# Altium PCB MainBoard_PCB.PcbDoc (part 2 of 2)
Units mm, origin at the board's own origin, x right, y up, seen from the top; angles counter-clockwise.
Board outline 240.1 x 211.02 mm, 2 copper layers (Top Layer, Bottom Layer), stack 3 mm thick; 164 components, 42 nets, 290 pads, 108 vias.
Unrouted connection lines stored in the file: 1.
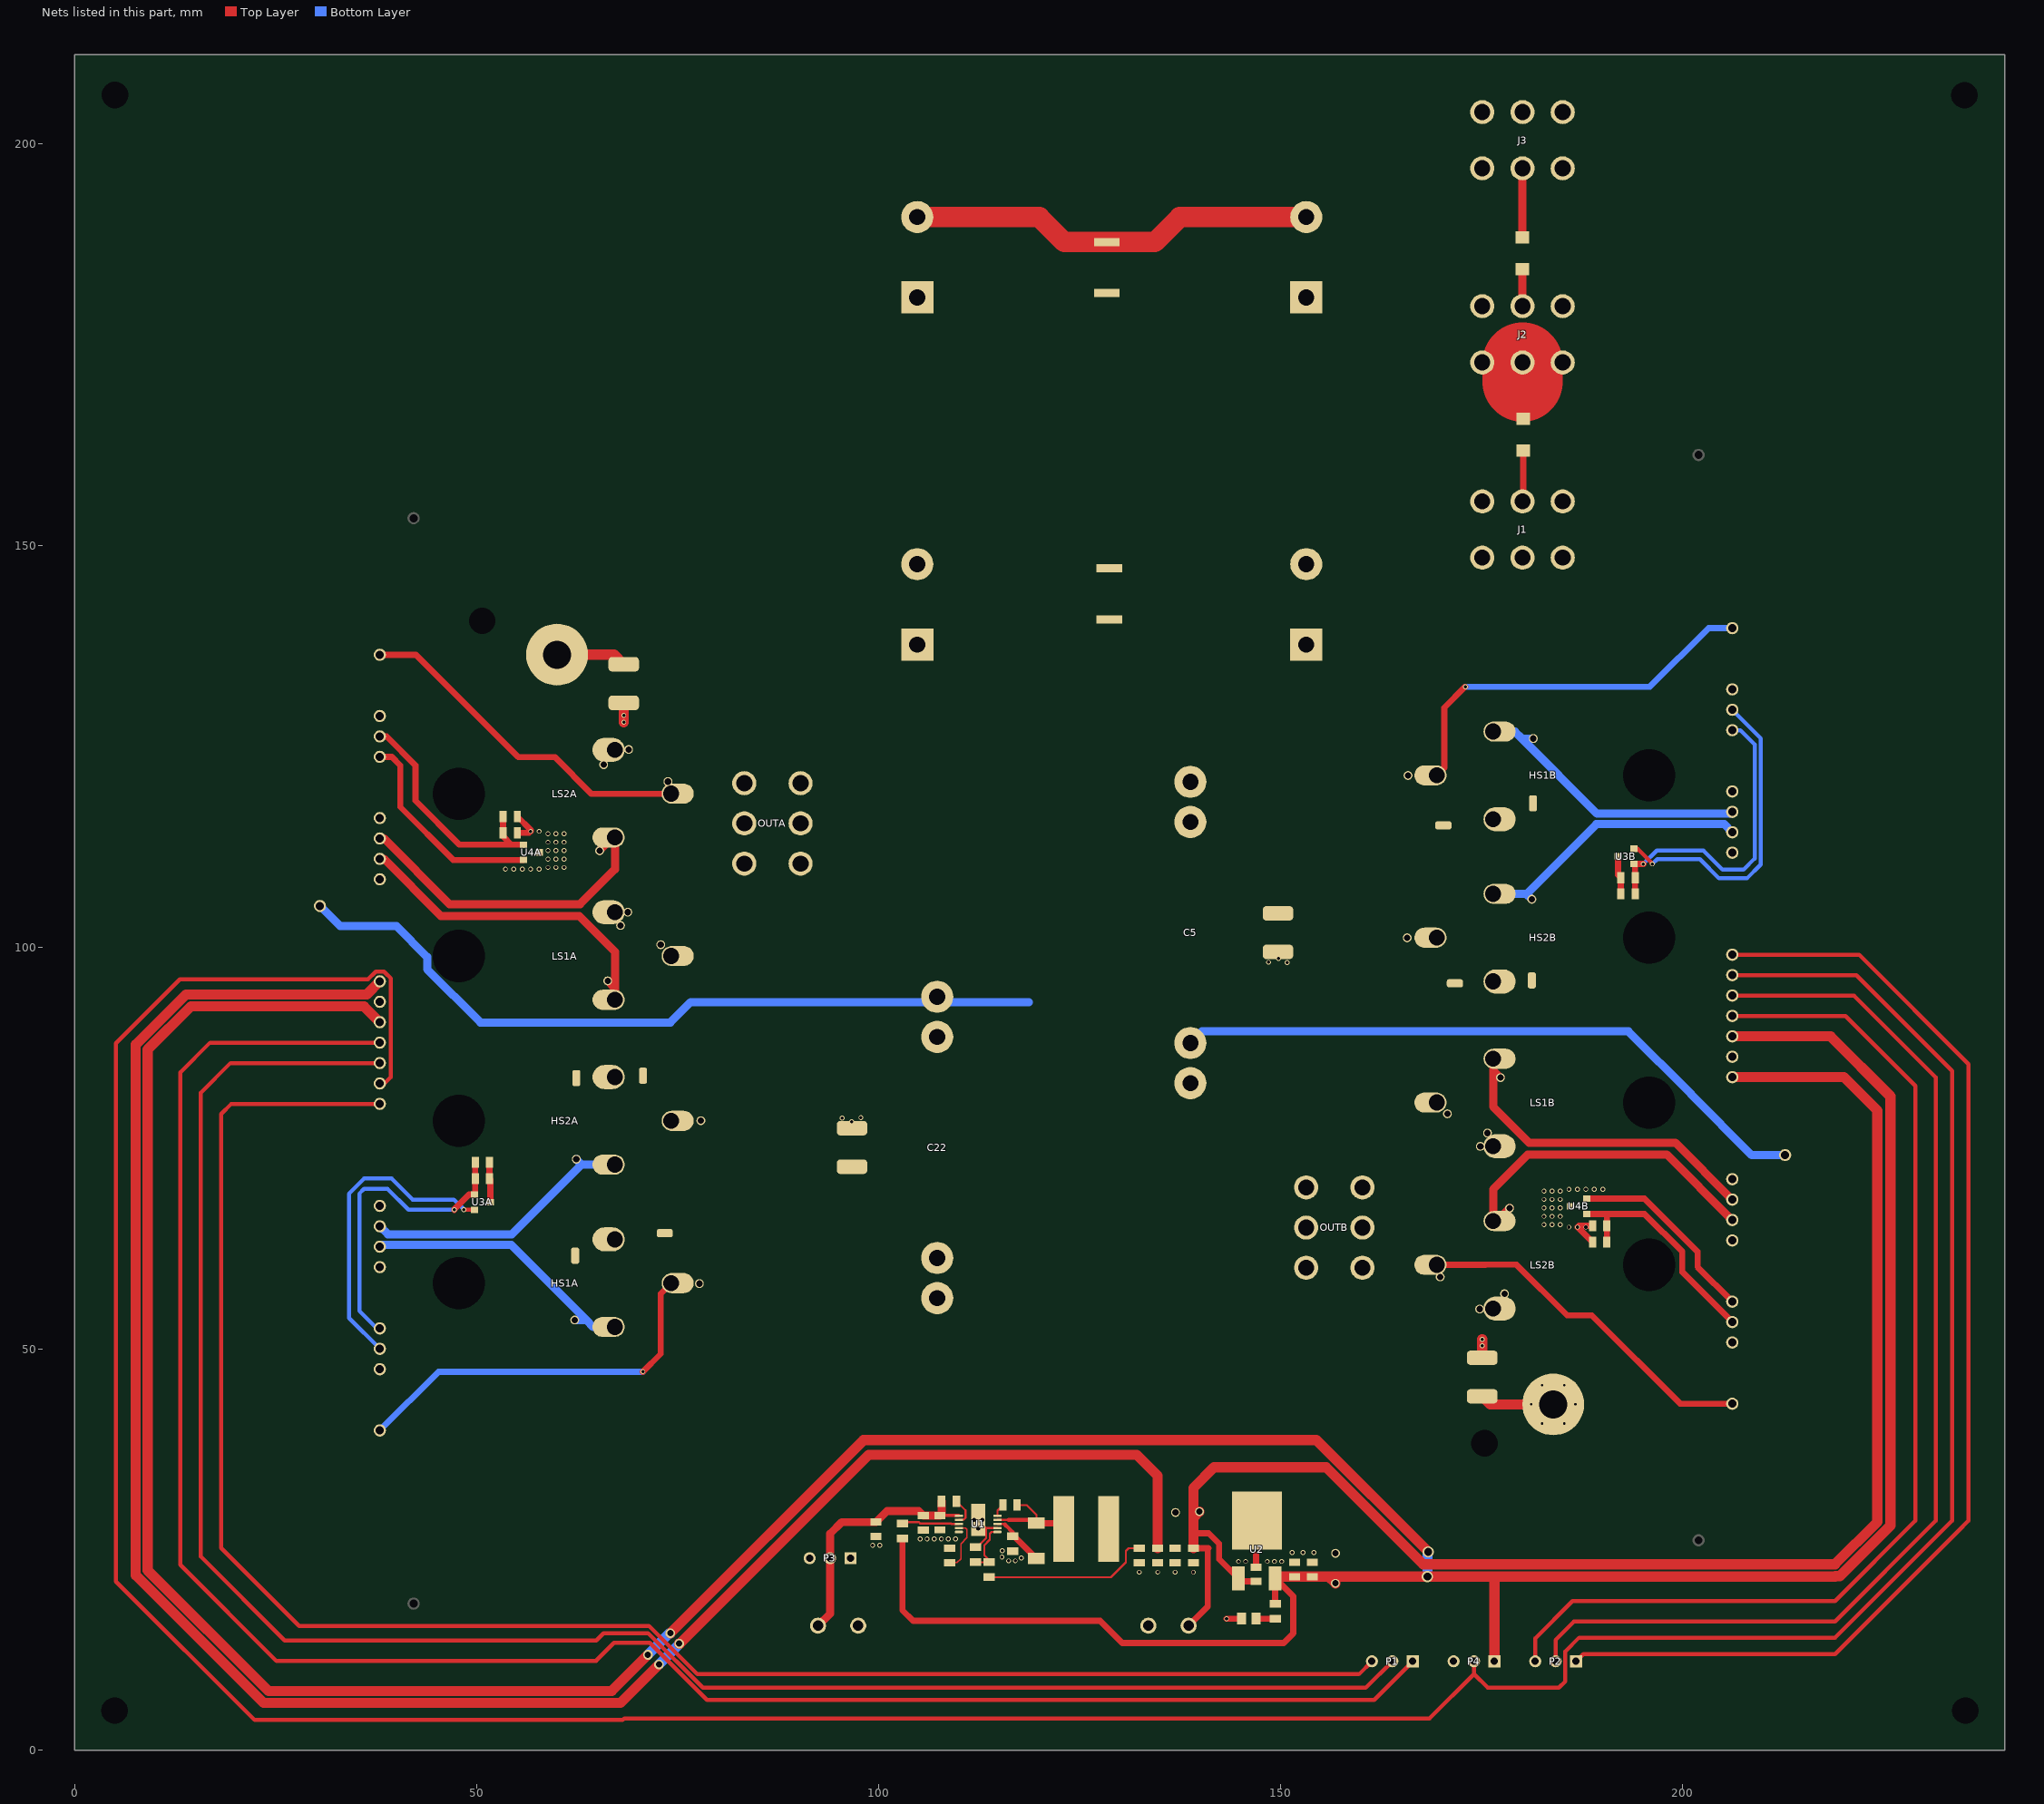
[diagram p2: the nets of this part, all layers, seen from the top]

## Part data
BD1A BD1B: library part Bonding_screw, "Used to connect the net to the heatsink below board", PN="M3 screw"
BD2A BD2B: library part Bonding_pad, "Used to connect carry the currents  from the GND logic plane back to the -DC_link plane, which is originated by parasitic capacitive coupling between Halfbridge output and GND plane", PN=none
C1 C2 C7 C8: "Aluminum Electrolytic Capacitor 1000UF 20% 250V SNAP", ClassName=strong_connection, PN=MAL215953102E3
C3A C3B C10 C17 C18 C19 C20 C21 C23A C23B C24A C24B C25A C25B: library part "Capacitor 0805", "SMD ceramic capacitor 0805", PN=undefined
  C10 C20: ClassName="Buck_circuit, direct_plane_connect"
  C17: ClassName=direct_plane_connect
  C18 C19 C21: ClassName=strong_connection
C4 C6: library part "Capacitor ceramic High Voltage", "High Voltage Ceramic SMD capacitor, two part numbers, 100nF", ClassName=strong_connection, PN="C1210C104KBRAC7800, C1812C104KDRAC7800"
C5 C22: library part "Capacitor Metalized Film", "Metalized Film Capacitor, two part numbers", ClassName=strong_connection, PN="PHE844RR7100MR06L2 ,B32794D2106K"
C9A C9B: library part "Y Capacitor", "High Voltage Capacitor to filter EMC from heatsink", ClassName=Direct_plane_connect, PN="C1210C104KBRAC7800, C1812C104KDRAC7800"
C11 C12 C13 C14 C15 C16: "SMD ceramic capacitor 0805", PN=undefined
  C11 C16: ClassName=Buck_circuit
  C12 C13 C14 C15: ClassName="Buck_circuit, strong_connection"
D1: "DIODE SCHOTTKY 60V 3A SOD128", ClassName=Buck_circuit, ComponentLink1Description=Datasheet, ComponentLink1URL=http://www.st.com/content/ccc/resource/technical/document/datasheet/group3/06/00/c2/7f/e8/20/4a/81/DM00306268/files/DM00306268.pdf/jcr:content/translations/en.DM00306268.pdf, PN=STPS360AF
D2 D3: "TVS DIODE 495V 760V DO214AC", ClassName=strong_connection, PN=SMAJ550-E3/61
D_HSA D_HSB D_LSA D_LSB ENA ENB ERRORA ERRORB G_HS_1A G_HS_1B G_HS_2A G_HS_2B G_LS_1A G_LS_1B G_LS_2A G_LS_2B GND_SENSE_HSA GND_SENSE_HSB GND_SENSE_LSA GND_SENSE_LSB IN_HSA IN_HSB IN_LSA IN_LSB PW_0A PW_0B PW_5A PW_5B PW_12A PW_12B S_HS_1A S_HS_1B S_HS_2A S_HS_2B S_LS_1A S_LS_1B S_LS_2A S_LS_2B V_TEMP_HSA V_TEMP_HSB V_TEMP_LSA V_TEMP_LSB VCC_ISO_HSA VCC_ISO_HSB VCC_ISO_LSA VCC_ISO_LSB: "Interconection between gatedriver and main board", System=Connector
FIX1A FIX1B FIX2A FIX2B: library part Mounting_hole, "Used to balance the mechanical load with the signal headers.", PN=none
FIX3 FIX4 FIX5 FIX6 FIX7 FIX8: "Mount Hole, to interface MainBoard with GatedriverBoard or MainBoard with heatsink", PN=none
  FIX5 FIX6: Additional_infos="Place close to heatsink bounding screw to avoid"
H1 H2: library part OSTTA020161, ClassName=strong_connection, PN=OSTTA020161
HS1A HS1B HS2A HS2B LS1A LS1B LS2A LS2B: library part MOSFET, "Power Mosfet N channel, TO-247, multiple part numbers", ClassName="Direct_plane_connect, Mosfets", PN="SCT2280KEC, STW28N65M2, IRFP4321PBFD"
J1 J2 J3 OUTA OUTB: "TERM SCREW M4 6 PIN PCB", ClassName=Direct_plane_connect, PN=36-7799-ND
  J1: port_name="DC Link +"
  J2: port_name="DC Link 0"
  J3: port_name="DC Link -"
L1: "Inductor 10UH 3.1A 50 mO SMD", ClassName="Buck_circuit, strong_connection", ComponentLink2Description=Datasheet, ComponentLink2URL=http://www.we-online.de/katalog/media/pdf/744862180.pdf, PN=SRN8040-100M
LE1: Color=Green
P1 P2 P3 P4: "Header 2.54mm 3 pins", PN=?
  P1: jumper_message="Side A signals", Pin_1_signal=Error_out, Pin_2_signal=LS_in, Pin_3_signal=HS_in
  P2: jumper_message="Side B signals", Pin_1_signal=Error_out, Pin_2_signal=LS_in, Pin_3_signal=HS_in
  P4: jumper_message="Select enable", Pin_1_signal=+5V, Pin_2_signal=Enable, Pin_3_signal=GND
R1 R2: "SMD resistor 2512, 150kOhm", PN=CRCW2512150KFKEG
R3 R4 R5 R7 R9: "SMD resistor 0805", PN=undefined
  R3 R4 R5 R7: ClassName=Buck_circuit
R6: "RESISTOR 0.05 OHM 1% 1W SMD 1206", ClassName="Buck_circuit, strong_connection", PN=MCS1632R050FER
TP1A TP1B TP2A TP2B TP3A TP3B TP4A TP4B TP5A TP5B TP6A TP6B TP7A TP7B TP8A TP8B TP9A TP9B TP10A TP10B TP11A TP11B TP12A TP12B TP13A TP13B TP14A TP14B TP15A TP15B TP16A TP16B: "Test point to probe with oscilloscope", ClassName="Direct_plane_connect, test_point"
  TP1A TP1B: Signal_name=G1_HS
  TP2A TP2B: Signal_name=G1_LS
  TP3A TP3B: Signal_name=D1_LS
  TP4A TP4B: Signal_name=D1_HS
  TP5A TP5B TP13A TP13B: Signal_name=S1_HS
  TP6A TP6B TP14A TP14B: Signal_name=S1_LS
  TP7A TP7B: Signal_name=G2_HS
  TP8A TP8B: Signal_name=G2_LS
  TP9A TP9B: Signal_name=D2_HS
  TP10A TP10B TP15A TP15B: Signal_name=S2_HS
  TP11A TP11B: Signal_name=D2_LS
  TP12A TP12B TP16A TP16B: Signal_name=S2_LS
TP17 TP18 TP19 TP20: library part "Test point", "Test point to probe with oscilloscope", ClassName=Direct_plane_connect
  TP17: Signal_name=5V
  TP18 TP20: Signal_name=GND
  TP19: Signal_name=12V
U1: library part LM25011, "IC REG BUCK ADJ 2A 10MSOP", ClassName=Buck_circuit, ComponentLink1Description=Datasheet, ComponentLink1URL=http://www.ti.com/lit/ds/symlink/lm25011.pdf, PN=LM25011MYX/NOPB
U2: "IC REG LINEAR 5V 1A DPAK-3", ClassName=strong_connection, ComponentLink1Description=Datasheet, ComponentLink1URL=http://www.onsemi.com/pub/Collateral/MC7800-D.PDF, PN=MC7805BDTG
U3A U3B U4A U4B: library part MCP9700T-E/TT, "Low-Power Linear Active Thermistor IC, 3-Pin SOT-23, Extended Temperature, Tape and Reel", ComponentLink1Description="Manufacturer URL", ComponentLink1URL=http://www.microchip.com/, ComponentLink2Description=Datasheet, ComponentLink2URL=http://ww1.microchip.com/downloads/en/DeviceDoc/21942e.pdf, ComponentLink3Description="Package Specification", ComponentLink3URL=http://www.microchip.com/stellent/groups/techpub_sg/documents/packagingspec/en012702.pdf, PN=MCP9700T-E/TT
  U4A U4B: ClassName=Direct_plane_connect

## Via types
v1: diameter 0.6, hole 0.4, Top Layer to Bottom Layer, tented both sides, 87 vias
v2: diameter 0.5, hole 0.3, Top Layer to Bottom Layer, 12 vias
v3: diameter 1.2, hole 0.8, Top Layer to Bottom Layer, tented both sides, 4 vias
v4: diameter 0.5, hole 0.5, Top Layer to Bottom Layer, 3 vias
v5: diameter 1.4, hole 1, Top Layer to Bottom Layer, tented both sides, 2 vias

## Nets (pads, with @x,y where several pads share a name; then routed paths per layer and width w, separated by ;. In a path a pad name is that pad's centre, name@x,y a point inside that pad or via, vN(x,y) a via of type N, cw(c..) or ccw(c..) an arc to the next point about the centre after c; other vN are vias at no path point)
5V_HSA: C3A.1 C24A.1 U3A.1 VCC_ISO_HSA.1 | length 38.6
  Top Layer w0.762: v1(47.21,67.284) 47.21,67.34 49.054,69.184 U3A.1@49.719,69.184 49.825,69.29 C24A.1@49.825,71.171 ; C24A.1@49.772,71.224 49.825,71.277 C3A.1@49.825,73.203
  Bottom Layer w0.508: VCC_ISO_HSA.1@37.954,52.534 37.566,52.534 35.4,54.7 35.4,69.3 36,69.9 38.904,69.9 41.52,67.284 v1(47.21,67.284)
5V_HSB: C3B.1 C24B.1 U3B.1 VCC_ISO_HSB.1 | length 38.7
  Top Layer w0.762: C3B.1@194.125,106.604 C24B.1@194.125,108.61 194.125,110.2 U3B.1@194.001,110.324 v1(195.153,110.324)
  Bottom Layer w0.508: v1(195.153,110.324) 196.818,111.989 202.62,111.989 205.009,109.6 207.6,109.6 209,111 209,125.2 207.226,126.974 VCC_ISO_HSB.1@206.221,126.974
5V_LSA: C23A.1 C25A.1 U4A.1 VCC_ISO_LSA.1 | length 29.4
  Top Layer w0.762: VCC_ISO_LSA.1@38.454,126.194 38.806,126.194 42.4,122.6 42.4,118.2 47.876,112.724 54.322,112.724 ; C23A.1@53.283,116.227 C25A.1@53.283,114.195 53.283,113.763 54.322,112.724 ; U4A.1@55.801,112.724 54.322,112.724
5V_LSB: C23B.1 C25B.1 U4B.1 VCC_ISO_LSB.1 | length 28.7
  Top Layer w0.762: U4B.1@188.101,66.774 190.619,66.774 ; C23B.1@190.619,63.271 C25B.1@190.619,65.303 190.619,66.774 ; VCC_ISO_LSB.1@206.221,53.314 200,59.535 200,62.074 195.3,66.774 190.619,66.774
+5V: C18.1 C21.1 P4.1 PW_5A.1 PW_5B.1 R5.1 R9.2 TP17.1 U2.3 | length 522
  Top Layer w0.762: R5.1@102.972,26.402 102.972,17.466 104.309,16.129 127.576,16.129 130.331,13.374 150.4,13.374 151.6,14.574 151.6,19.18 U2.3@149.352,21.427 ; R9.2@149.372,18.252 149.352,18.272 U2.3@149.352,21.427 ; U2.3@149.562,21.637 U2.3@149.352,21.427
  Top Layer w1.27: PW_5A.1@37.954,90.634 35.98,92.608 14.448,92.608 9.056,87.217 9.056,72.9 9.056,22.431 24.096,7.391 66.793,7.391 v3(71.302,11.9) ; v3(74.1,14.6) 98.133,38.633 154.474,38.633 v5(168.393,24.714) ; U2.3@149.562,21.637 C18.1@151.772,21.637 C21.1@153.972,21.637 156.002,21.637 ; TP17.1@156.836,20.803 156.002,21.637 ; P4.1@176.623,11.1 176.623,21.614 176.6,21.637 ; PW_5B.1@206.221,88.874 218.434,88.874 225.9,81.408 225.9,27.992 219.61,21.702 219.065,21.702 219,21.637 176.6,21.637 ; 156.002,21.637 v5(168.292,21.637) 176.6,21.637
  Bottom Layer w1.27: v3(71.302,11.9) 74.002,14.6 v3(74.1,14.6) ; v5(168.292,21.637) 168.292,24.613 v5(168.393,24.714)
+12V: C12.1 C13.1 C14.1 C15.1 C19.1 H1.1 L1.2 PW_12A.1 PW_12B.1 R4.2 TP19.1 U2.1 | length 473.6
  Top Layer w0.254: R4.2@114.045,21.556 128.901,21.556 130.772,23.427 130.772,24.827 131.11,25.165 C15.1@132.445,25.165
  Top Layer w0.762: H1.1@138.572,15.527 140.972,17.927 140.972,25.164 ; C12.1@139.176,25.164 140.972,25.164 ; 139.272,27.027 141.072,27.027 142.372,25.727 142.372,23.827 U2.1@144.772,21.427 145.162,21.037 C19.1@146.972,21.037 ; 141.036,25.164 140.972,25.164
  Top Layer w1.27: PW_12A.1@37.954,95.714 36.322,94.082 13.837,94.082 7.583,87.827 7.583,72.9 7.583,21.821 23.486,5.918 67.907,5.918 v3@72.594,10.606 ; v3(75.194,13.3) 75.288,13.3 98.793,36.805 132.122,36.805 134.731,34.196 C13.1@134.731,25.165 ; C12.1@139.176,25.164 139.176,28.974 ; TP19.1@139.92,29.718 139.176,28.974 ; PW_12B.1@206.221,83.794 220.106,83.794 224.268,79.632 224.268,28.444 219,23.176 167.757,23.176 155.677,35.255 141.749,35.255 139.176,32.682 139.176,28.974
  Bottom Layer w1.27: v3(72.688,10.7) 75.194,13.206 v3(75.194,13.3)
+DC_link: C1.1 C2.1 C4.1 C5.1 C6.1 C22.1 D2.2 D_HSA.1 D_HSB.1 HS1A.2 HS1B.2 HS2A.2 HS2B.2 J1.1 R1.2 TP4A.1 TP4B.1 TP9A.1 TP9B.1 | length 104.7
  Top Layer w0.762: v1(70.674,47.134) 72.894,49.354 72.894,56.841 HS1A.2@74.211,58.158 HS1A.2@75.558,58.158 ; HS1B.2@169.464,121.35 170.4,122.286 170.4,129.773 v1(173.001,132.374) ; J1.1@180.119,155.44 180.219,155.54 D2.2@180.219,161.77
  Bottom Layer w0.762: D_HSA.1@37.954,39.834 45.254,47.134 v1(70.674,47.134) ; v1(173.001,132.374) 195.974,132.374 203.274,139.674 D_HSB.1@206.221,139.674
-DC_link: BD2A.1 BD2B.1 C4.2 C5.2 C6.2 C7.2 C8.2 C9A.2 C9B.2 C22.2 C23A.2 C23B.2 C25A.2 C25B.2 D3.1 GND_SENSE_LSA.1 GND_SENSE_LSB.1 J3.1 LS1A.3 LS1B.3 LS2A.3 LS2B.3 R2.1 S_LS_1A.1 S_LS_1B.1 S_LS_2A.1 S_LS_2B.1 TP6A.1 TP6B.1 TP12A.1 TP12B.1 TP14A.1 TP14B.1 TP16A.1 TP16B.1 U4A.3 U4B.3 | length 250.3
  Top Layer w0.762: C25A.2@55.063,114.195 56.535,114.195 v1(56.724,114.384) 56.724,114.565 C23A.2@55.063,116.227 ; C23B.2@188.839,63.271 186.987,65.124 v1(186.951,65.124) 187.13,65.303 C25B.2@188.839,65.303
  Top Layer w1.016: D3.1@180.103,188.304 180.103,196.881 J3.1@180.119,196.897
  Top Layer w1.27: v1(68.301,127.974) v1(68.301,128.803) C9A.2@68.301,130.374 ; C9B.2@175.101,48.874 v1(175.101,50.374) v1(175.101,51.174)
  Top Layer w2.54: C7.2@104.819,190.827 120,190.827 123.101,187.725 R2.1@128.419,187.725 134.373,187.725 137.475,190.827 C8.2@153.219,190.827
  Bottom Layer w1.016: BD2B.1@30.5,105.1 33,102.6 40,102.6 43.84,98.76 43.84,97.233 50.473,90.6 74.1,90.6 76.625,93.125 118.701,93.125 ; C5.2@138.8,88.05 140.25,89.5 193.3,89.5 201.078,81.722 201.078,81.664 208.647,74.095 BD2A.1@212.794,74.095
  other v1: 185.901,65.124 188.001,65.124 182.801,65.424 183.801,65.424 184.801,65.424 182.801,66.474 183.801,66.474 184.801,66.474 182.801,67.524 183.801,67.524 184.801,67.524 182.801,68.574 183.801,68.574 184.801,68.574 182.801,69.624 183.801,69.624 184.801,69.624 185.901,69.824 186.951,69.824 188.001,69.824 189.051,69.824 190.101,69.824 96.65,78.249 95.474,78.682 97.81,78.758 150.845,98.041 148.508,98.092 149.751,98.576 53.574,109.684 54.624,109.684 55.674,109.684 56.724,109.684 57.774,109.684 58.874,109.884 59.874,109.884 60.874,109.884 58.874,110.934 59.874,110.934 60.874,110.934 58.874,111.984 59.874,111.984 60.874,111.984 58.874,113.034 59.874,113.034 60.874,113.034 58.874,114.084 59.874,114.084 60.874,114.084 57.774,114.384
Buck_SW: C11.2 D1.2 L1.1 U1.9 | length 12.7
  Top Layer w0.254: U1.9@114.794,28.695 116.163,28.695 ; C11.2@117.249,30.541 118.432,30.541 119.645,29.328 D1.2@119.645,28.281
  Top Layer w0.508: 116.163,28.695 119.231,28.695 D1.2@119.645,28.281
  Top Layer w0.762: D1.2@119.645,28.281 122.337,28.281 L1.1@123.041,27.577
Earth: P3.3
Enable: ENA.1 ENB.1 P4.2 | length 458.5
  Top Layer w0.508: ENA.1@37.954,83.014 38.514,83.014 39.3,83.8 39.3,96.1 38.7,96.7 38.693,96.7 38.459,96.933 37.449,96.933 36.477,95.961 13.059,95.961 5.119,88.021 5.119,72.9 5.119,21.034 22.369,3.785 68.165,3.785 68.38,4 168.566,4 174.083,9.517 ; P4.2@174.083,11.1 174.083,9.517 ; ENB.1@206.221,96.494 221.66,96.494 233.57,84.584 233.57,28.611 219,14.041 187.159,14.041 185.45,12.332 185.45,8.597 184.651,7.798 175.802,7.798 174.083,9.517
Gate_HS_1A: G_HS_1A.1 HS1A.1 TP1A.1 | length 35
  Bottom Layer w1.016: G_HS_1A.1@37.954,62.694 38.194,62.934 44.7,62.934 54.274,62.934 63.634,53.574 ; TP1A.1@62.201,53.574 63.634,53.574 ; HS1A.1@67.211,52.708 64.501,52.708 63.634,53.574
Gate_HS_1B: G_HS_1B.1 HS1B.1 TP1B.1 | length 35.5
  Bottom Layer w1.016: HS1B.1@176.464,126.8 179.175,126.8 180.041,125.934 ; TP1B.1@181.474,125.934 180.041,125.934 ; G_HS_1B.1@206.221,116.814 205.981,116.574 189.401,116.574 180.041,125.934
Gate_HS_2A: G_HS_2A.1 HS2A.1 TP7A.1 | length 34.2
  Bottom Layer w1.016: G_HS_2A.1@37.954,65.234 38.954,64.234 44.7,64.234 54.374,64.234 63.045,72.904 63.071,72.904 ; TP7A.1@62.401,73.574 63.071,72.904 ; HS2A.1@67.211,72.904 63.071,72.904
Gate_HS_2B: G_HS_2B.1 HS2B.1 TP7B.1 | length 34.7
  Bottom Layer w1.016: HS2B.1@176.464,106.604 180.605,106.604 ; TP7B.1@181.274,105.934 180.605,106.604 ; G_HS_2B.1@206.221,114.274 205.221,115.274 189.301,115.274 180.631,106.604 180.605,106.604
Gate_LS_1A: G_LS_1A.1 LS1A.1 TP2A.1 | length 40.8
  Top Layer w1.016: G_LS_1A.1@38.454,110.954 45.544,103.864 62.744,103.864 67.211,99.397 67.211,94.864 ; TP2A.1@66.301,95.774 67.211,94.864 ; LS1A.1@67.211,93.424 67.211,94.864
Gate_LS_1B: G_LS_1B.1 LS1B.1 TP2B.1 | length 41.8
  Top Layer w1.016: LS1B.1@176.464,86.084 176.464,84.644 ; TP2B.1@177.374,83.734 176.464,84.644 ; G_LS_1B.1@206.221,68.554 199.131,75.644 180.931,75.644 176.464,80.111 176.464,84.644
Gate_LS_2A: G_LS_2A.1 LS2A.1 TP8A.1 | length 40.5
  Top Layer w1.016: G_LS_2A.1@38.454,113.494 46.614,105.334 62.874,105.334 67.211,109.671 LS2A.1@67.211,113.62 66.947,113.62 TP8A.1@65.301,111.974
Gate_LS_2B: G_LS_2B.1 LS2B.1 TP8B.1 | length 41.6
  Top Layer w1.016: TP8B.1@178.501,67.474 176.915,65.888 LS2B.1@176.464,65.888 176.464,69.837 180.801,74.174 198.061,74.174 G_LS_2B.1@206.221,66.014
GND: C10.2 C12.2 C13.2 C14.2 C15.2 C16.2 C17.2 C18.2 C19.2 C20.2 C21.2 H1.2 H2.1 LE1.2 P3.1 P4.3 PW_0A.1 PW_0B.1 R6.1 R7.1 TP18.1 TP20.1 U1.5 U1.7 U1.11 U2.2 | length 9.8
  Top Layer w0.254: R7.1@112.045,25.306 112.27,25.306 113.394,26.43 113.394,27.694 ; U1.11@112.045,28.346 U1.11@112.394,28.695 113.394,27.694 ; U1.7@114.794,27.694 113.394,27.694
  Top Layer w0.762: v1(143.3,16.4) 145.145,16.4 LE1.2@145.172,16.427 ; C19.2@146.972,22.817 146.972,24.327
  other v1: 132.445,22.181 134.731,22.181 136.89,22.181 139.176,22.18 144.772,23.527 145.672,23.527 148.372,23.527 149.272,23.527 150.172,23.527 116.171,23.597 117.009,23.597 117.771,23.952 115.358,24.079 151.472,24.627 152.822,24.627 154.172,24.627 115.384,24.867 99.272,25.527 100.172,25.527 105.172,26.327 106.051,26.327 106.93,26.327 107.809,26.327 108.688,26.327 109.567,26.327
  other v4: 112.394,27.595 111.894,28.695 112.894,28.695
Heatsink: BD1A.1 BD1B.1 C9A.1 C9B.1 | length 18.1
  Top Layer w1.27: BD1A.1@60.001,136.374 67.101,136.374 C9A.1@68.301,135.174 ; C9B.1@175.101,44.074 176.106,43.069 v2(181.194,43.069) BD1B.1@183.944,43.069
  other v2: 182.569,40.687 185.319,40.687 186.694,43.069 182.569,45.451 185.319,45.451
NetC1_2: C1.2 C2.2 C7.1 C8.1 D2.1 D3.2 J2.1 R1.1 R2.2 | length 7
  Top Layer w1: D3.2@180.103,184.364 180.103,179.756 J2.1@180.119,179.74
  Top Layer w10: 180.119,170.33 J2.1@180.119,172.74
NetC11_1: C11.1 U1.10 | length 1.6
  Top Layer w0.254: U1.10@114.794,29.195 114.794,29.866 C11.1@115.469,30.541
NetC16_1: C16.1 U1.4 | length 6.7
  Top Layer w0.152: C16.1@108.856,23.367 109.769,23.367 110.253,23.851 110.253,25.73 111.015,26.492 111.015,27.508 110.829,27.694 U1.4@109.993,27.694
NetD1_1: D1.1 R6.2 U1.8 | length 7.1
  Top Layer w0.254: U1.8@114.814,28.174 U1.8@114.794,28.195 115.662,28.195 115.873,27.984
  Top Layer w0.508: 115.741,28.111 115.868,27.984 115.873,27.984 116.672,27.185 R6.2@116.672,26.652
  Top Layer w0.762: R6.2@116.74,26.709 116.817,26.709 D1.1@119.645,23.881
NetERRORA_1: ERRORA.1 P1.3 | length 224.6
  Top Layer w0.508: ERRORA.1@37.954,80.474 19.474,80.474 18.2,79.2 18.2,72.9 18.2,25.2 27.9,15.5 71.45,15.5 77.461,9.489 159.772,9.489 P1.3@161.383,11.1
NetERRORB_1: ERRORB.1 P2.1 | length 148.8
  Top Layer w0.508: P2.1@186.326,11.532 P2.1@186.707,11.151 ; P2.1@186.783,11.405 P2.1@186.783,11.1 187.677,11.994 219,11.994 234.295,27.289 235.617,28.611 235.617,85.433 222.016,99.034 ERRORB.1@206.221,99.034
NetIN_HSA_1: IN_HSA.1 P1.1 | length 251.9
  Top Layer w0.508: IN_HSA.1@37.954,88.094 16.834,88.094 13.12,84.379 13.12,72 13.12,23.096 25.091,11.125 64.9,11.125 64.9,11.2 67.1,13.4 71.538,13.4 78.638,6.3 161.663,6.3 P1.1@166.463,11.1
NetIN_HSB_1: IN_HSB.1 P2.3 | length 136.7
  Top Layer w0.508: P2.3@181.703,11.1 181.703,13.945 186.351,18.593 219,18.593 229.018,28.611 229.018,82.699 220.303,91.414 IN_HSB.1@206.221,91.414
NetIN_LSA_1: IN_LSA.1 P1.2 | length 238.7
  Top Layer w0.508: IN_LSA.1@37.954,85.554 19.374,85.554 15.66,81.839 15.66,24.148 26.106,13.702 64.9,13.702 65.798,14.6 71.344,14.6 78.144,7.8 160.623,7.8 P1.2@163.923,11.1
NetIN_LSB_1: IN_LSB.1 P2.2 | length 140.8
  Top Layer w0.508: P2.2@184.243,11.1 184.243,13.767 186.529,16.053 219,16.053 231.558,28.611 231.558,83.751 221.355,93.954 IN_LSB.1@206.221,93.954
NetLE1_1: LE1.1 R9.1 | length 2.4
  Top Layer w0.762: LE1.1@146.972,16.427 146.997,16.402 R9.1@149.372,16.402
NetR3_2: R3.2 U1.2 | length 3.5
  Top Layer w0.254: R3.2@109.7,31.013 110.833,29.879 110.833,28.952 110.596,28.715 109.993,28.715 U1.2@109.993,28.695
NetR4_1: R4.1 R7.2 U1.6 | length 6.9
  Top Layer w0.254: R7.2@112.045,23.456 112.095,23.406 R4.1@113.772,23.406 ; R4.1@113.772,23.452 113.772,23.678 113.157,24.293 113.157,25.547 113.851,26.241 113.851,26.987 114.058,27.194 U1.6@114.794,27.194
NetR5_2: R5.2 U1.3 | length 7.2
  Top Layer w0.254: R5.2@102.972,28.252 103.12,28.4 105.025,28.4 105.172,28.252 109.026,28.252 109.084,28.195 U1.3@109.993,28.195
Source_HSA: C3A.2 C24A.2 D_LSA.1 GND_SENSE_HSA.1 HS1A.3 HS2A.3 LS1A.2 LS2A.2 OUTA.1 S_HS_1A.1 S_HS_2A.1 TP3A.1 TP5A.1 TP10A.1 TP11A.1 TP13A.1 TP15A.1 U3A.3 | length 50.7
  Top Layer w0.762: D_LSA.1@37.954,136.354 42.446,136.354 55.166,123.634 59.706,123.634 64.297,119.043 74.184,119.043 73.801,119.426 TP11A.1@73.801,120.574 ; C3A.2@51.605,73.203 C24A.2@51.605,71.171 51.719,71.057 U3A.3@51.719,68.234
  Bottom Layer w0.762: LS2A.2@73.801,119.48 LS2A.2@74.211,119.07
Source_HSB: C3B.2 C24B.2 D_LSB.1 GND_SENSE_HSB.1 HS1B.3 HS2B.3 LS1B.2 LS2B.2 OUTB.1 S_HS_1B.1 S_HS_2B.1 TP3B.1 TP5B.1 TP10B.1 TP11B.1 TP13B.1 TP15B.1 U3B.3 | length 48.8
  Top Layer w0.762: LS2B.2@169.464,60.438 175.49,60.438 175.518,60.465 179.378,60.465 185.691,54.153 188.747,54.153 199.746,43.154 D_LSB.1@206.221,43.154 ; U3B.3@192.001,111.274 192.001,108.954 C24B.2@192.345,108.61 C3B.2@192.345,106.604
Temp_HSA: U3A.2 V_TEMP_HSA.1 | length 38.9
  Top Layer w0.508: v1(48.404,67.284) U3A.2@49.719,67.284
  Bottom Layer w0.508: V_TEMP_HSA.1@37.954,49.994 34.13,53.818 34.13,69.3 36,71.17 39.43,71.17 42.046,68.554 47.189,68.554 48.404,67.339 v1(48.404,67.284)
Temp_HSB: U3B.2 V_TEMP_HSB.1 | length 39.3
  Top Layer w0.508: U3B.2@194.001,112.224 194.439,112.224 196.283,110.38 v1(196.283,110.324)
  Bottom Layer w0.508: v1(196.283,110.324) 196.88,110.922 202.178,110.922 204.567,108.533 208.042,108.533 209.754,110.246 209.754,125.954 206.221,129.488 V_TEMP_HSB.1@206.221,129.514
Temp_LSA: U4A.2 V_TEMP_LSA.1 | length 25.7
  Top Layer w0.762: V_TEMP_LSA.1@38.454,123.654 39.446,123.654 40.5,122.6 40.5,117.413 47.089,110.824 U4A.2@55.801,110.824
Temp_LSB: U4B.2 V_TEMP_LSB.1 | length 24.5
  Top Layer w0.762: U4B.2@188.101,68.674 195.3,68.674 201.9,62.074 201.9,60.175 V_TEMP_LSB.1@206.221,55.854
Vin: C10.1 C17.1 C20.1 H2.2 P3.2 R3.1 U1.1 | length 33.2
  Top Layer w0.381: C10.1@107.632,29.251 107.632,30.795 R3.1@107.85,31.013 ; C10.1@107.647,29.251 U1.1@109.993,29.251
  Top Layer w1: H2.2@92.473,15.527 93.972,17.027 P3.2@93.972,23.927 93.972,26.972 95.417,28.417 C17.1@99.672,28.417 101.055,29.8 104.99,29.8 C20.1@105.572,29.217 107.613,29.217 C10.1@107.632,29.236 107.647,29.251 107.85,29.454 R3.1@107.85,31.013
pads on no net: FIX1A.FIX FIX1B.FIX FIX2A.FIX FIX2B.FIX FIX3. FIX4. FIX5. FIX6. FIX7. FIX8. HS1A.Fixing HS1B.Fixing HS2A.Fixing HS2B.Fixing LS1A.Fixing LS1B.Fixing LS2A.Fixing LS2B.Fixing
copper on no net: | length 2.7
  Top Layer w1.27: 60.001,136.374 v2(62.751,136.374)
  other v2: 58.626,133.992 61.376,133.992 57.251,136.374 58.626,138.756 61.376,138.756

## Polygon pours and split planes (outlines as drawn)
Source_HSB on Top Layer "Output_plane_B_side" (solid, pour order 126): 199.7,109.398 201.515,109.398 cw(c201.515,107.015) 203.2,108.7 203.356,108.544 ccw(c205.152,110.34) 205.152,107.8 208.01,107.8 ccw(c208.01,110.19) 209.7,108.5 210.056,108.856 ccw(c208.26,110.652) 210.8,110.652 210.8,139.448 ccw(c208.26,139.448) 210.056,141.244 209.5,141.8 ccw(c208.293,140.593) 208.293,142.3 205.352,142.3 ccw(c205.352,139.76) 203.556,141.556 197.244,135.244 cw(c195.448,137.04) 195.448,134.5 177.3,134.474 174.701,134.474 173.24,133.013 173.24,120.366 167.555,114.681 167.555,105.461 170.552,102.464 170.552,99.009 168.927,97.384 163.999,97.384 158.745,92.13 ccw(c161.27,89.498) 157.624,89.573 157.624,88.691 157.624,87.808 cw(c153.454,87.808) 156.402,84.859 153.679,82.136 ccw(c156.039,79.768) 152.696,79.774 152.696,75.854 152.696,75.069 cw(c151.006,75.069) 152.201,73.874 149.696,71.369 ccw(c150.891,70.174) 149.201,70.174 149.201,59.626 ccw(c151.741,59.626) 149.945,57.83 150.643,57.132 ccw(c152.439,58.928) 152.439,56.388 169.301,56.388 ccw(c169.301,59.409) 171.437,57.273 171.536,57.372 172.52,58.355 ccw(c170.51,60.321) 173.321,60.321 173.321,60.322 173.321,60.333 173.321,60.354 173.321,60.608 173.321,60.71 ccw(c169.685,60.71) 172.255,63.282 cw(c178.09,66.947) 171.201,66.802 171.201,73.756 cw(c178.438,73.756) 173.321,78.874 173.321,81.991 172.626,82.686 cw(c174.013,84.074) 172.051,84.074 172.051,86.614 cw(c175.116,86.614) 172.949,88.782 174.591,90.424 cw(c176.307,88.709) 176.307,91.135 176.308,91.135 181.449,91.135 184.37,93.929 184.37,106.305 184.386,106.29 186.47,108.374 187.494,109.398
Source_HSA on Top Layer "Output_plane_A_side" (solid, pour order 122): 34.549,72.7 ccw(c34.549,70.651) 33.1,72.1 32.944,71.944 ccw(c34.74,70.148) 32.2,70.148 32.2,40.849 ccw(c34.249,40.849) 32.8,39.4 33.756,38.444 ccw(c35.552,40.24) 35.552,37.7 37.248,37.7 ccw(c37.248,40.24) 39.044,38.444 45.779,45.179 cw(c47.575,43.383) 47.575,45.923 54.551,45.923 54.551,70.104 56.22,70.104 57.04,70.924 cw(c55.244,72.72) 55.244,70.18 46.5,70.18 43.652,70.2 cw(c43.652,72.74) 41.856,70.944 40.844,71.956 ccw(c39.048,70.16) 39.048,72.7
Source_HSA on Top Layer "Output_plane_A_side" (solid, pour order 110): 54.551,45.923 54.551,70.104 56.22,70.104 57.25,71.134 59.305,73.189 59.305,85.579 62.099,88.373 65.932,88.373 67.373,88.373 ccw(c67.368,90.8) 69.084,89.084 70.726,90.726 ccw(c68.559,92.894) 71.624,92.894 71.624,95.434 ccw(c69.664,95.435) 71.05,96.821 70.354,97.517 70.354,100.634 ccw(c65.238,105.752) 72.474,105.752 72.474,112.705 ccw(c65.589,112.562) 71.42,116.226 cw(c73.992,118.798) 70.354,118.799 70.354,119.154 cw(c73.15,119.186) 70.354,119.186 cw(c73.167,119.186) 71.156,121.153 72.139,122.136 72.238,122.235 cw(c74.374,120.1) 74.374,123.12 74.398,123.12 92.566,123.12 cw(c92.566,121.94) 93.401,122.774 cw(c91.954,121.326) 93.999,121.422 cw(c91.981,119.882) 94.519,119.882 94.519,108.744 cw(c91.98,108.744) 93.775,106.948 91.768,104.941 ccw(c93.563,103.145) 91.024,103.145 91.024,101.949 cw(c88.485,101.948) 90.28,100.153 86.84,96.713 ccw(c88.636,94.917) 86.096,94.917 86.096,90.817 86.096,89.935 cw(c82.451,90.01) 84.975,87.378 79.721,82.124 74.793,82.124 73.168,80.499 73.168,77.044 76.165,74.047 76.165,64.827 70.48,59.142 70.48,45.923
+DC_link on Top Layer "+DC_link_cap_to_fets_plane_A_side" (solid, pour order 128): 74.252,60.357 73.557,60.357 72.5,59.3 72.5,56.7 73.5,55.7 73.5,52.152 74.252,51.4 137.327,51.4 142.101,56.174 142.101,73.834 151.096,82.829 151.096,88.849 160.964,98.717 170.311,98.717 171.619,100.025 171.619,102.337 170.417,103.539 166.209,103.539 166.209,117.627 166.209,118.339 167.022,119.151 170.298,119.151 171.568,120.421 171.568,122.225 169.841,123.952 169.841,132.095 cw(c172.381,132.095) 170.585,133.891 179.968,143.274 cw(c181.764,141.478) 181.764,144.018 181.998,144.018 186.899,144.018 ccw(c186.899,146.558) 188.693,144.76 189.417,145.484 ccw(c187.622,147.28) 190.161,147.28 190.161,157.876 190.161,160.453 ccw(c188.08,160.453) 189.689,161.774 ccw(c188.845,160.946) 188.856,162.128 164.823,162.128 ccw(c164.823,159.588) 163.027,161.384 161.111,159.469 ccw(c162.907,157.673) 160.367,157.673 160.367,152.425 160.367,146.569 cw(c157.827,146.569) 159.623,144.773 157.047,142.197 cw(c155.251,143.992) 155.251,141.453 149.496,141.58 103.414,141.58 ccw(c103.414,139.325) 101.82,140.919 101.802,140.901 ccw(c103.598,139.105) 101.058,139.105 101.058,127.722 ccw(c103.598,127.722) 101.802,125.926 102.073,125.602 102.581,125.094 102.905,124.772 cw(c101.11,122.976) 103.649,122.976 103.649,103.149 81.291,80.791 73.364,80.791 72.056,79.483 72.056,77.171 73.258,75.969 77.466,75.969 77.466,62.866 74.957,60.357
-DC_link on Top Layer "LS_temperature_sensor_B" (solid, pour order 96): 191.401,66.12 187.397,66.12 187.397,69.321 191.401,69.321 191.401,70.724 182.101,70.724 182.101,64.424 191.401,64.424
-DC_link on Top Layer "-DC_link_bypass_plane_B" (solid, pour order 120): 96.529,76.523 98.943,76.523 ccw(c98.943,76.87) 99.188,76.625 ccw(c98.882,76.931) 99.315,76.931 99.315,78.482 ccw(c98.708,78.482) 99.138,78.911 ccw(c98.647,78.42) 98.647,79.114 97.639,79.114 96.75,79.114 95.601,79.114 ccw(c95.601,77.596) 94.528,78.669 94.388,78.53 ccw(c95.125,77.793) 94.083,77.793 94.083,77.298 ccw(c95.278,77.298) 94.224,76.734 ccw(c94.734,77.244) 94.734,76.523
NetC1_2 on Top Layer "Central_point_DC_link_clamper_connect_plane" (solid, pour order 118): 97.919,146.762 ccw(c100.459,146.762) 98.663,144.966 98.974,144.654 ccw(c100.77,146.45) 100.77,143.91 155.419,143.91 158.019,146.51 158.019,163.297 cw(c160.132,163.375) 158.583,164.814 158.741,164.973 cw(c159.886,163.828) 159.886,165.447 174.837,165.447 174.93,165.354 186.994,165.354 ccw(c186.994,167.175) 188.282,165.887 ccw(c187.441,166.728) 188.63,166.728 188.63,182.833 ccw(c187.701,182.833) 188.358,183.49 ccw(c187.965,183.097) 188.317,183.527 187.981,183.866 ccw(c186.185,182.07) 186.185,184.61 100.919,184.61 100.847,184.539 100.14,184.539 ccw(c100.14,182.604) 98.772,183.972 98.652,183.853 ccw(c100.448,182.056) 97.908,182.056 97.919,181.559
-DC_link on Top Layer "-DC_link_clamper_connect_plane" (solid, pour order 116): 186.954,188.138 ccw(c186.954,189.872) 188.18,188.646 ccw(c187.138,189.688) 188.612,189.688 188.63,190.906 188.63,206.454 187.13,207.954 173.43,207.954 172.23,206.754 172.23,190.985 ccw(c174.568,190.985) 172.915,189.332 173.364,188.882 ccw(c175.161,190.678) 175.161,188.138
-DC_link on Top Layer "LS_temperature_sensor_A" (solid, pour order 94): 52.501,113.378 56.505,113.378 56.505,110.177 52.501,110.177 52.501,108.774 61.801,108.774 61.801,115.074 52.501,115.074
GND on Top Layer "GND_LDO_5V_top" (solid, pour order 20): 151.572,25.227 151.272,25.527 151.272,25.827 151.272,32.427 150.272,33.427 143.572,33.427 142.972,32.827 142.972,24.627 144.372,23.227 150.572,23.227 150.972,22.827 154.672,22.827 155.072,23.227 155.072,24.527 154.372,25.227
-DC_link on Top Layer "-DC_link_bypass_plane_B" (solid, pour order 52): 149.872,100.302 147.458,100.302 ccw(c147.458,99.955) 147.213,100.2 ccw(c147.519,99.894) 147.086,99.894 147.086,98.343 ccw(c147.693,98.343) 147.263,97.914 ccw(c147.754,98.405) 147.754,97.711 148.762,97.711 149.651,97.711 150.8,97.711 ccw(c150.8,99.229) 151.873,98.155 152.013,98.295 ccw(c151.276,99.032) 152.318,99.032 152.318,99.527 ccw(c151.123,99.527) 152.177,100.091 ccw(c151.667,99.581) 151.667,100.302
GND on Top Layer "GND_buck_freewheeling_plane" (solid, pour order 12): 117.272,23.127 118.222,24.077 118.222,24.577 117.372,25.427 115.522,25.427 115.072,24.977 115.072,24.127 116.072,23.127
GND on Top Layer "ground_buck_bypass_caps" (solid, pour order 6): 140.645,23.981 131.645,23.981 131.145,23.481 131.145,22.281 131.745,21.681 140.345,21.681 140.945,22.281 140.945,23.681
GND on Top Layer "GND_buck_freewheeling_plane2" (solid, pour order 18): 98.572,25.227 98.872,24.927 100.672,24.927 100.872,25.127 100.872,26.927 100.572,27.227 98.872,27.227 98.572,26.927
+12V on Top Layer "12_buck_output_plane" (solid, pour order 10): 130.945,24.481 129.945,23.481 126.945,23.481 126.245,24.181 126.245,31.281 127.245,32.281 130.045,32.281 130.345,31.981 133.945,28.381 140.245,28.381 141.545,27.081 141.545,25.081 140.945,24.481
GND on Top Layer "Buck_GND_input" (solid, pour order 2): 108.772,27.737 109.128,27.381 110.634,27.381 110.685,27.33 110.685,26.822 109.897,26.035 109.897,24.587 109.465,24.155 107.814,24.155 107.611,24.359 107.611,25.679 107.459,25.827 104.672,25.827 104.372,26.127 104.372,27.661 104.436,27.737
-DC_link on Bottom Layer "-DC_link_bulk_caps_plane" (solid, pour order 114): 174.678,206.883 170.512,206.883 ccw(c170.512,204.343) 168.716,206.139 161.822,199.245 cw(c160.026,201.041) 160.026,198.501 156.947,198.501 142.409,198.501 97.106,198.501 95.227,198.501 ccw(c95.227,195.961) 93.431,197.757 88.383,192.71 ccw(c89.548,191.545) 87.901,191.545 87.901,132.629 cw(c85.473,132.629) 87.19,130.912 87.076,130.798 cw(c85.28,132.594) 85.28,130.054 66.113,130.054 66.113,129.775 62.582,126.244 62.582,90.506 58.101,86.025 58.101,61.474 70.101,49.474 132.065,49.474 140.027,57.436 140.027,127.074 169.401,127.074 171.438,129.111 171.438,132.911 179.998,141.471 cw(c181.794,139.675) 181.794,142.215 187.331,142.215 ccw(c187.331,144.755) 189.127,142.959 193.957,147.788 ccw(c192.161,149.584) 194.701,149.584 194.701,179.029 194.701,191.512 194.701,202.096 ccw(c192.816,202.096) 194.149,203.429 191.439,206.139 ccw(c189.643,204.343) 189.643,206.883 185.705,206.883
-DC_link on Bottom Layer "-DC_link_A_side_plane" (solid, pour order 92): 41.3,137.699 42.548,137.699 cw(c42.548,135.159) 44.344,136.956 55.656,125.644 ccw(c57.452,127.44) 57.452,124.9 57.6,124.892 60.178,124.892 ccw(c60.178,127.432) 61.974,125.636 62.582,126.244 69.474,118.434 69.474,102.634 66.974,100.134 62.574,100.134 60.574,102.134 45.6,102.134 43.552,102.1 cw(c43.552,104.64) 41.756,102.844 39.844,104.756 ccw(c38.048,102.96) 38.1,105.499 37.567,105.499 cw(c37.567,106.867) 36.6,105.9 cw(c37.807,107.107) 36.1,107.107 36.1,136.234 cw(c37.466,136.234) 36.5,137.2 cw(c37.707,135.993) 37.707,137.7 41.248,137.7 cw(c41.248,135.178)
-DC_link on Bottom Layer "-DC_link_B_side_plane" (solid, pour order 78): 205.648,73.7 cw(c205.648,71.16) 207.444,72.956 207.799,72.599 cw(c205.96,70.848) 208.5,70.848 208.5,43.649 cw(c206.452,43.649) 207.9,42.2 cw(c206.934,43.166) 206.934,41.8 200.652,41.8 cw(c200.652,44.34) 198.856,42.544 189.744,51.656 ccw(c187.948,49.86) 187.948,52.4 175.839,52.4 cw(c175.839,53.267) 175.226,52.654 174.945,52.935 cw(c176.741,54.731) 174.201,54.731 174.201,76.874 176.701,79.374 181.101,79.374 183.101,77.374 197,77.374 198.648,77.4 cw(c198.648,74.86) 200.444,76.656 202.656,74.444 ccw(c204.452,76.24) 204.452,73.7
-DC_link on Bottom Layer "-DC_link_B_side_plane" (solid, pour order 40): 103.649,51.486 105.681,49.454 177.563,49.454 177.563,49.733 181.093,53.264 181.093,89.002 183.901,91.809 183.901,117.411 171.438,129.874 111.45,129.874 103.649,122.072
GND on Bottom Layer "gnd_buck_main_plane" (solid, pour order 8): 215.4,9.086 222.734,9.086 ccw(c222.734,11.626) 224.53,9.83 236.356,21.656 ccw(c234.56,23.452) 237.1,23.452 237.1,88.748 ccw(c234.56,88.748) 236.356,90.544 226.344,100.556 ccw(c224.548,98.76) 224.548,101.3 215.6,101.34 214.6,101.336 205.369,101.336 ccw(c205.369,100.532) 204.8,101.1 ccw(c205.283,100.617) 204.6,100.617 204.6,83.39 ccw(c206.99,83.39) 205.3,81.7 ccw(c206.437,82.837) 206.437,81.229 216,81.229 218.148,81.2 cw(c218.148,78.66) 219.944,80.456 220.3,80.1 cw(c218.61,78.41) 221,78.41 221,31.752 cw(c218.46,31.752) 220.256,29.956 219.898,29.598 cw(c218.102,31.394) 218.102,28.854 184.294,28.854 167.073,28.931 155.363,40.64 93.413,40.64 82.44,29.667 20.945,29.667 cw(c20.945,31.145) 19.9,30.1 cw(c20.866,31.066) 19.5,31.066 19.5,77.717 cw(c20.183,77.717) 19.7,78.2 cw(c20.183,77.717) 20.183,78.4 37.448,78.4 ccw(c37.448,80.94) 39.244,79.144 39.523,79.441 ccw(c37.56,81.052) 40.1,81.052 40.1,95.851 ccw(c38.052,95.852) 39.5,97.3 39.307,97.493 ccw(c37.6,95.786) 37.6,98.2 31.983,98.2 cw(c31.983,98.883) 31.5,98.4 28.7,98.425 19.3,98.425 12.377,98.425 ccw(c12.377,95.885) 10.581,97.681 3.344,90.444 ccw(c5.14,88.648) 2.6,88.648 2.6,21.152 ccw(c5.14,21.152) 3.344,19.356 20.156,2.544 ccw(c21.952,4.34) 21.952,1.8 39,1.829 189.552,1.829 193.819,5.892 196.994,9.042

## Silkscreen, mask and mechanical layers (free items; w line width, h text height)
Top Overlay:
  drawing of 41 lines, arcs and shapes, not listed
  text "+Vin" at 91.973,10.927 h1 r270
  text "0V" at 96.973,10.927 h1 r270
  text "0V" at 133.073,10.927 h1 r270
  text "12V" at 138.073,10.927 h1 r270
  text "October 2018" at 208.4,8.1 h1.5
  text "L. H. D. Possatti," at 208.5,5.163 h1
  text "J. F. Guerreiro, H. G. Junior" at 203.152,2.56 h1
Mechanical 1:
  lines w0.762: 146.27,8.433 146.27,10.77
board_shape:
  the board outline again, w0.1
Mechanical 15:
  lines w0.5: 222.5,57.5 222.5,81.5 222.6,81.5
Drill Drawing:
  circle w0.254: c258.499,126.949 r3.212
  lines w0.254: 255.286,115.706 261.711,115.706 258.499,109.281 255.286,115.706
  lines w0.381: 249.746,104.944 476.223,104.944 ; 249.746,133.856 476.223,133.856 ; 300.565,90.488 300.565,148.312 ; 356.955,90.488 356.955,148.312 ; 403.438,90.488 403.438,148.312 ; 249.746,90.488 476.223,90.488 476.223,148.312 249.746,148.312 249.746,90.488
  text "Symbol" at 258.42,138.193 h6.94
  text "Count" at 304.902,138.193 h6.94
  text "Plated" at 361.292,138.193 h6.94
  text "Hole Type" at 407.774,138.193 h6.94
  text "14" at 304.902,123.737 h5.78
  text "NPTH" at 361.292,123.737 h5.78
  text "Round" at 407.774,123.737 h5.78
  text "276" at 304.902,109.281 h5.78
  text "PTH" at 361.292,109.281 h5.78
  text "(Mixed)" at 407.774,109.281 h5.78
  text "290 Total" at 304.902,94.824 h5.78

## Text inside footprints (layer, text, board x,y; h text height)
C1: Top Overlay "+" at 152.219,124.727 h2 r270
C2: Top Overlay "+" at 103.819,124.727 h2 r270
C7: Top Overlay "+" at 103.819,167.927 h2 r270
C8: Top Overlay "+" at 152.219,167.927 h2 r270
HS1A: Top Overlay "G" at 63.841,52.46 h1 r90; Top Overlay "D" at 72.341,57.86 h1 r90; Top Overlay "S" at 63.841,63.36 h1 r90; Bottom Overlay "D" at 72.341,58.458 h1 r90; Bottom Overlay "S" at 63.841,63.958 h1 r90; Bottom Overlay "G" at 63.841,53.058 h1 r90
HS1B: Top Overlay "S" at 179.834,116.148 h1 r270; Top Overlay "D" at 171.334,121.648 h1 r270; Top Overlay "G" at 179.834,127.048 h1 r270; Bottom Overlay "G" at 179.834,126.45 h1 r270; Bottom Overlay "S" at 179.834,115.55 h1 r270; Bottom Overlay "D" at 171.334,121.05 h1 r270
HS2A: Top Overlay "G" at 63.841,72.656 h1 r90; Top Overlay "D" at 72.341,78.056 h1 r90; Top Overlay "S" at 63.841,83.556 h1 r90; Bottom Overlay "D" at 72.341,78.654 h1 r90; Bottom Overlay "S" at 63.841,84.154 h1 r90; Bottom Overlay "G" at 63.841,73.254 h1 r90
HS2B: Top Overlay "S" at 179.834,95.951 h1 r270; Top Overlay "D" at 171.334,101.452 h1 r270; Top Overlay "G" at 179.834,106.852 h1 r270; Bottom Overlay "G" at 179.834,106.254 h1 r270; Bottom Overlay "S" at 179.834,95.354 h1 r270; Bottom Overlay "D" at 171.334,100.854 h1 r270
LS1A: Top Overlay "G" at 63.841,93.176 h1 r90; Top Overlay "D" at 72.341,98.576 h1 r90; Top Overlay "S" at 63.841,104.076 h1 r90; Bottom Overlay "D" at 72.341,99.174 h1 r90; Bottom Overlay "S" at 63.841,104.674 h1 r90; Bottom Overlay "G" at 63.841,93.774 h1 r90
LS1B: Top Overlay "S" at 179.834,75.432 h1 r270; Top Overlay "D" at 171.334,80.932 h1 r270; Top Overlay "G" at 179.834,86.332 h1 r270; Bottom Overlay "G" at 179.834,85.734 h1 r270; Bottom Overlay "S" at 179.834,74.834 h1 r270; Bottom Overlay "D" at 171.334,80.334 h1 r270
LS2A: Top Overlay "G" at 63.841,113.373 h1 r90; Top Overlay "D" at 72.341,118.773 h1 r90; Top Overlay "S" at 63.841,124.273 h1 r90; Bottom Overlay "D" at 72.341,119.37 h1 r90; Bottom Overlay "S" at 63.841,124.87 h1 r90; Bottom Overlay "G" at 63.841,113.97 h1 r90
LS2B: Top Overlay "S" at 179.834,55.235 h1 r270; Top Overlay "D" at 171.334,60.735 h1 r270; Top Overlay "G" at 179.834,66.135 h1 r270; Bottom Overlay "G" at 179.834,65.538 h1 r270; Bottom Overlay "S" at 179.834,54.638 h1 r270; Bottom Overlay "D" at 171.334,60.138 h1 r270
TP1A: Top Overlay "TP_'.Signal_name'" at 53.4,53.2 h1
TP1B: Top Overlay "TP_'.Signal_name'" at 182.501,125.674 h1
TP2A: Top Overlay "TP_'.Signal_name'" at 61.205,97.003 h1
TP2B: Top Overlay "TP_'.Signal_name'" at 178.501,83.474 h1
TP3A: Top Overlay "TP_'.Signal_name'" at 73.701,100.674 h1
TP3B: Top Overlay "TP_'.Signal_name'" at 162.145,77.622 h1
TP4A: Top Overlay "TP_'.Signal_name'" at 78.7,57.8 h1
TP4B: Top Overlay "TP_'.Signal_name'" at 157.04,120.828 h1
TP5A: Top Overlay "TP_'.Signal_name'" at 53.6,60.9 h1
TP5B: Top Overlay "TP_'.Signal_name'" at 182.301,117.574 h1
TP6A: Top Overlay "TP_'.Signal_name'" at 69.501,104.174 h1
TP6B: Top Overlay "TP_'.Signal_name'" at 166.057,74.752 h1
TP7A: Top Overlay "TP_'.Signal_name'" at 55.109,75.082 h1
TP7B: Top Overlay "TP_'.Signal_name'" at 182.301,105.674 h1
TP8A: Top Overlay "TP_'.Signal_name'" at 66.201,110.974 h1
TP8B: Top Overlay "TP_'.Signal_name'" at 169.943,68.301 h1
TP9A: Top Overlay "TP_'.Signal_name'" at 78.901,78.174 h1
TP9B: Top Overlay "TP_'.Signal_name'" at 156.8,100.9 h1
TP10A: Top Overlay "TP_'.Signal_name'" at 71.501,83.674 h1
TP10B: Top Overlay "TP_'.Signal_name'" at 161.789,95.123 h1
TP11A: Top Overlay "TP_'.Signal_name'" at 69.994,121.818 h1
TP11B: Top Overlay "TP_'.Signal_name'" at 164.431,57.099 h1
TP12A: Top Overlay "TP_'.Signal_name'" at 59.123,120.447 h1
TP12B: Top Overlay "TP_'.Signal_name'" at 178.701,56.574 h1
TP13A: Top Overlay "TP_'.Signal_name'" at 74.801,64.174 h1
TP13B: Top Overlay "TP_'.Signal_name'" at 164.075,116.408 h1
TP14A: Top Overlay "TP_'.Signal_name'" at 60.697,100.559 h1
TP14B: Top Overlay "TP_'.Signal_name'" at 176.547,77.114 h1
TP15A: Top Overlay "TP_'.Signal_name'" at 53.281,83.21 h1
TP15B: Top Overlay "TP_'.Signal_name'" at 182.101,95.574 h1
TP16A: Top Overlay "TP_'.Signal_name'" at 68.47,125.73 h1
TP16B: Top Overlay "TP_'.Signal_name'" at 165.803,54.559 h1
TP17: Top Overlay "TP_'.Signal_name'" at 157.725,20.625 h1
TP18: Top Overlay "TP_'.Signal_name'" at 157.903,24.308 h1
TP19: Top Overlay "TP_'.Signal_name'" at 140.149,30.988 h1 r90
TP20: Top Overlay "TP_'.Signal_name'" at 137.202,30.658 h1 r90